# Altium PCB UFQFPN-48_L7.0-W7.0-P0.50-BL-EP5.6_2025-09-03.pcbdoc
Units mm, origin at the board's own origin, x right, y up, seen from the top; angles counter-clockwise.
Board outline 37.71 x 33.95 mm, 2 copper layers (Top Layer, Bottom Layer); 1 components, 0 nets, 49 pads, 0 vias.
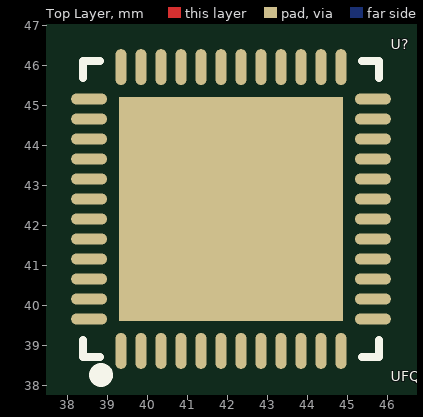
[diagram p0: Top Layer view]
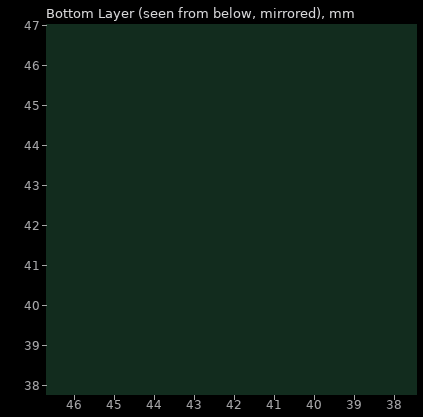
[diagram p1: Bottom Layer view, seen from below]

## Layer stack, top to bottom
Top Layer: signal copper (thickness not stored)
Dielectric: dielectric 0.32, FR-4, Dk 4.8
Bottom Layer: signal copper (thickness not stored)

## Board outline
63.113,25.4 25.4,25.4 25.4,59.351 63.113,59.351

## Components (designator, comment, footprint, x,y, rotation, side; value= is the part's Value field where it differs from the comment)
U? "UFQFPN-48_L7.0-W7.0-P0.50-BL-EP5.6" UFQFPN-48_L7.0-W7.0-P0.50-BL-EP5.6 42.097,42.249 r0 top

## Footprints (in the part's own frame and the unit in brackets; to place one, negate y for a bottom-side part, rotate by r counter-clockwise, add the part's x,y. Pads: shape width x height; smd on the part's side, far side on the other; paste and mask are expansions set on the pad)
UFQFPN-48_L7.0-W7.0-P0.50-BL-EP5.6 [mm]
  oval 0.28x0.9 smd paste-100 mask+0.051: 1(-2.751,-3.396) 2(-2.25,-3.396) 3(-1.75,-3.396) 4(-1.25,-3.396) 5(-0.749,-3.396) 6(-0.249,-3.396) 7(0.249,-3.396) 8(0.749,-3.396) 9(1.25,-3.396) 10(1.75,-3.396) 11(2.25,-3.396) 12(2.751,-3.396) 25(2.751,3.698) 26(2.25,3.698) 27(1.75,3.698) 28(1.25,3.698) 29(0.749,3.698) 30(0.249,3.698) 31(-0.249,3.698) 32(-0.749,3.698) 33(-1.25,3.698) 34(-1.75,3.698) 35(-2.25,3.698) 36(-2.751,3.698)
  oval 0.9x0.28 smd paste-100 mask+0.051: 13(3.547,-2.599) 14(3.547,-2.099) 15(3.547,-1.599) 16(3.547,-1.099) 17(3.547,-0.599) 18(3.547,-0.099) 19(3.547,0.401) 20(3.547,0.901) 21(3.547,1.401) 22(3.547,1.901) 23(3.547,2.401) 24(3.547,2.901) 37(-3.547,2.902) 38(-3.547,2.402) 39(-3.547,1.901) 40(-3.547,1.401) 41(-3.547,0.901) 42(-3.547,0.4) 43(-3.547,-0.098) 44(-3.547,-0.598) 45(-3.547,-1.098) 46(-3.547,-1.599) 47(-3.547,-2.099) 48(-3.547,-2.6)
  rect 5.6x5.6 smd paste-100 mask+0.051: 49(0,0.151)
  silkscreen extent -3.7,-4.15 3.7,3.85

## Nets (pads, with @x,y where several pads share a name; then routed paths per layer and width w, separated by ;. In a path a pad name is that pad's centre, name@x,y a point inside that pad or via, vN(x,y) a via of type N, cw(c..) or ccw(c..) an arc to the next point about the centre after c; other vN are vias at no path point)
pads on no net: U?.1 U?.2 U?.3 U?.4 U?.5 U?.6 U?.7 U?.8 U?.9 U?.10 U?.11 U?.12 U?.13 U?.14 U?.15 U?.16 U?.17 U?.18 U?.19 U?.20 U?.21 U?.22 U?.23 U?.24 U?.25 U?.26 U?.27 U?.28 U?.29 U?.30 U?.31 U?.32 U?.33 U?.34 U?.35 U?.36 U?.37 U?.38 U?.39 U?.40 U?.41 U?.42 U?.43 U?.44 U?.45 U?.46 U?.47 U?.48 U?.49